# Altium PCB gui.PcbDoc
Units mm, origin at the board's own origin, x right, y up, seen from the top; angles counter-clockwise.
Board outline 33.53 x 44.07 mm, 2 copper layers (Top Layer, Bottom Layer); 7 components, 13 nets, 43 pads, 0 vias.
Unrouted connection lines stored in the file: 1.
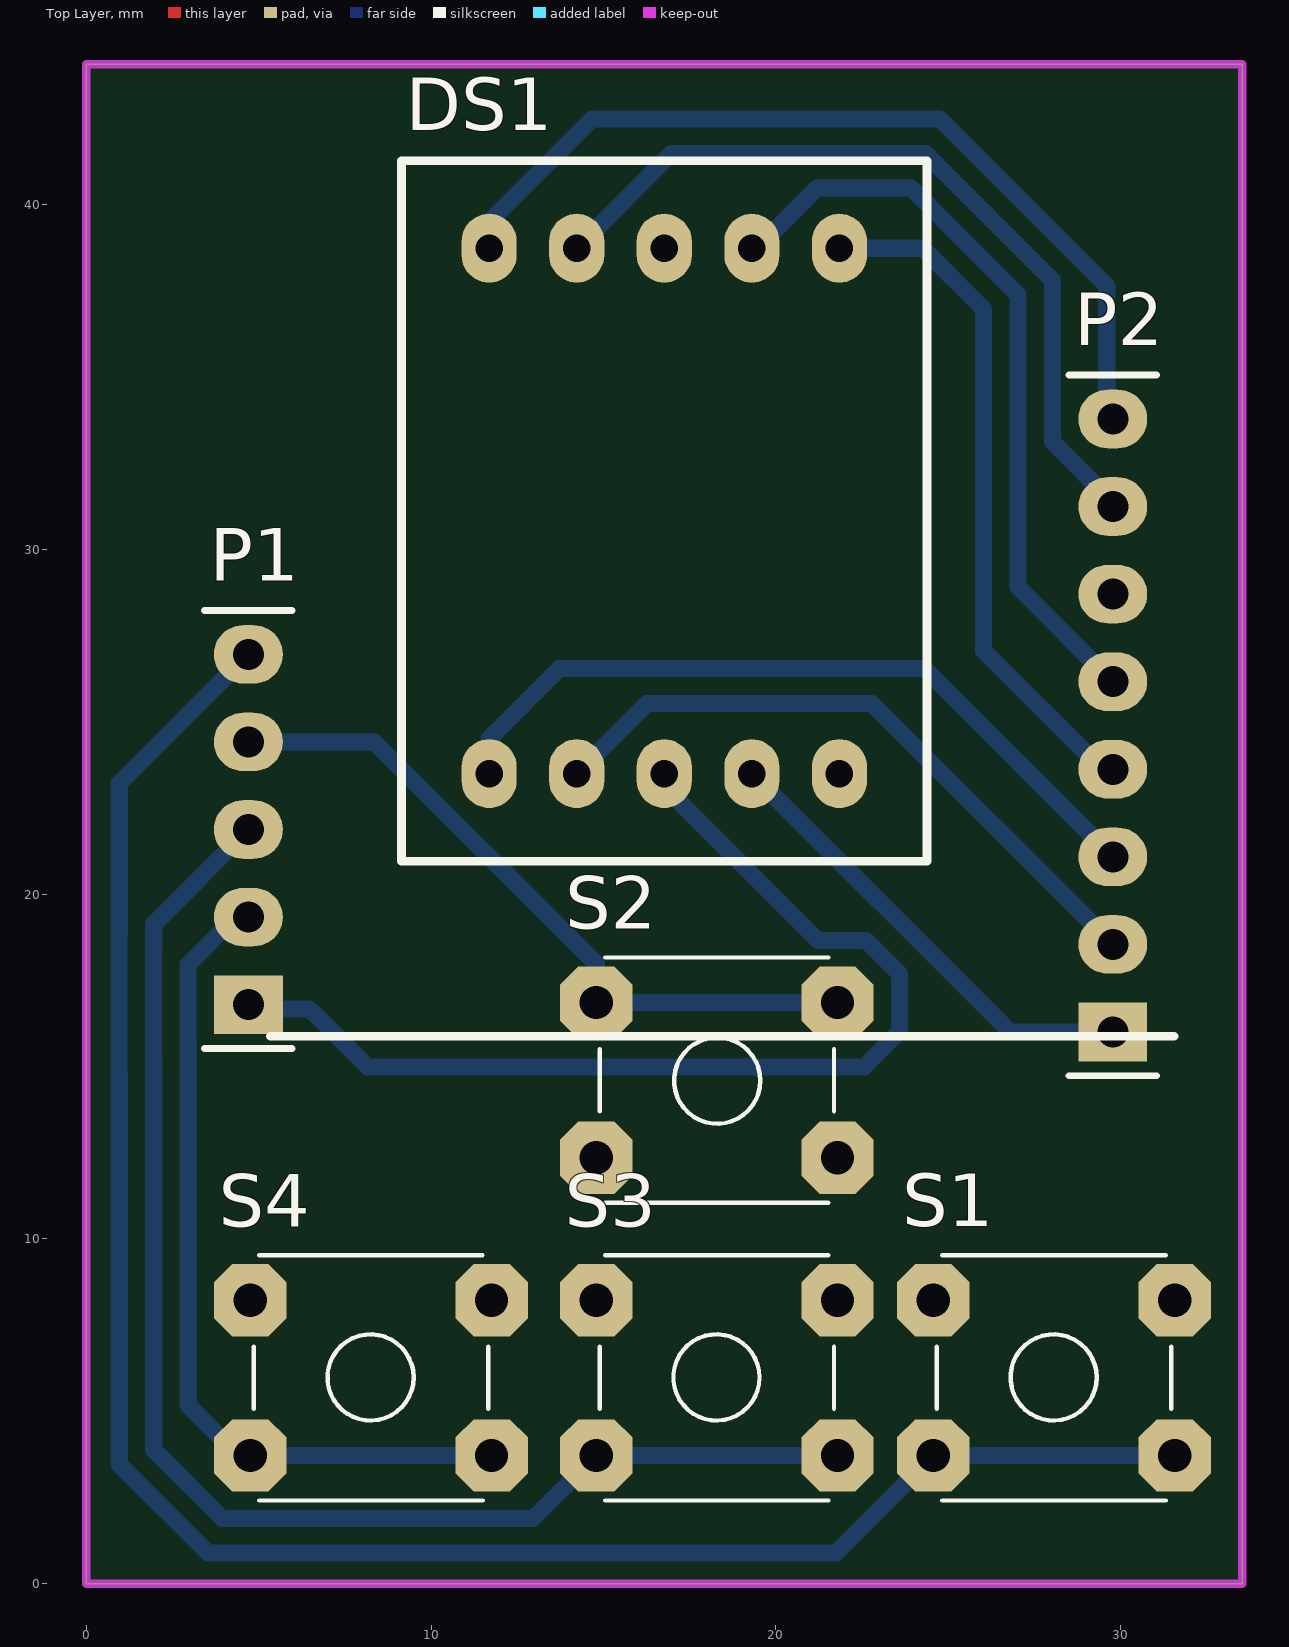
[diagram p0: Top Layer view]
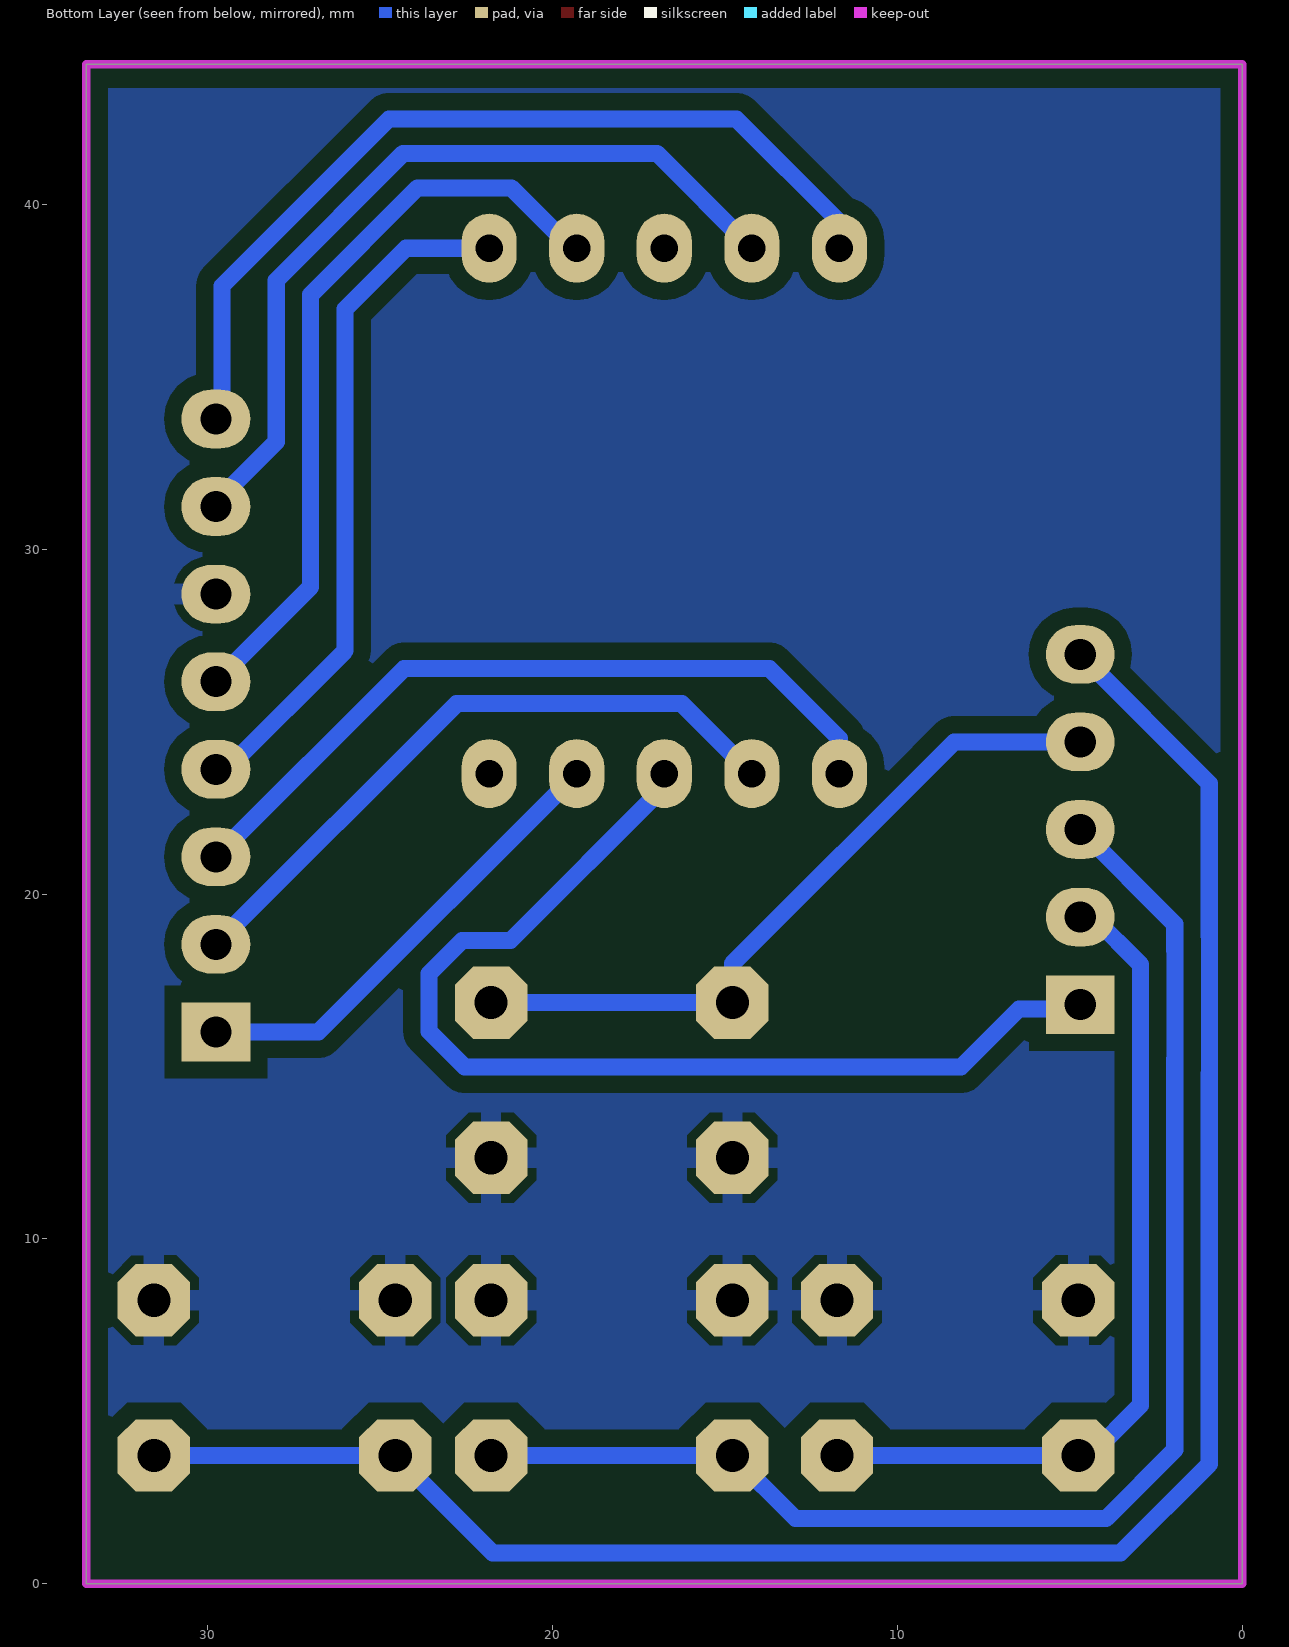
[diagram p1: Bottom Layer view, seen from below]
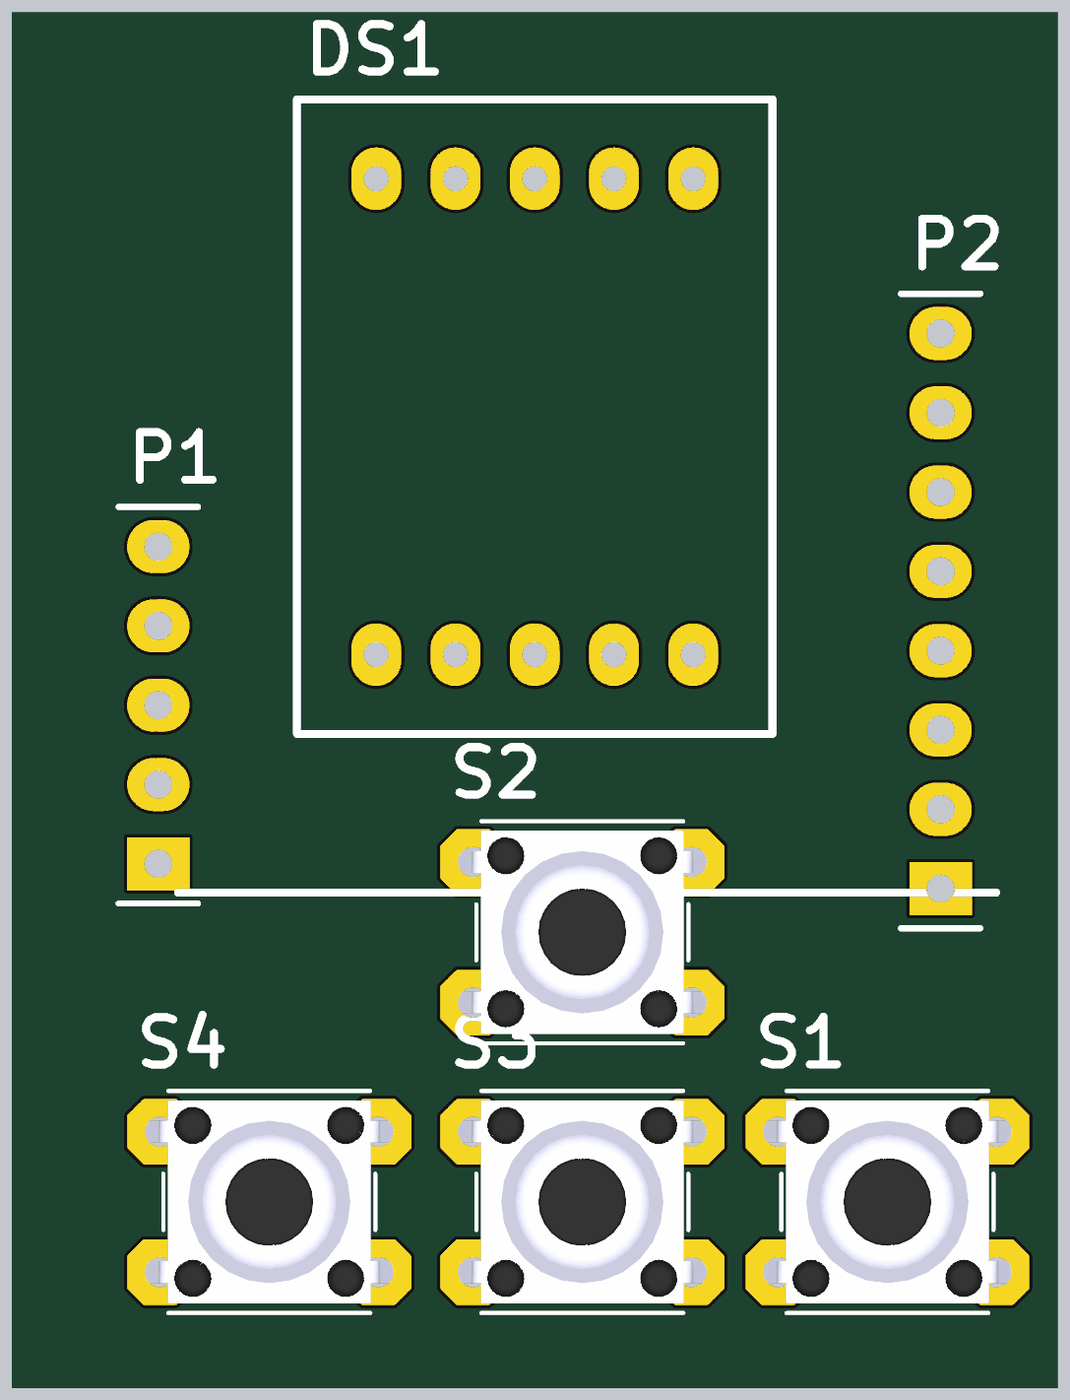
[diagram p2: 3D render of the assembled board from above, using the file's embedded part models]

## Layer stack, top to bottom
Top Solder: solder mask 0.0102, Solder Resist, Dk 3.5
Top Layer: signal copper 0.0356
Dielectric 1: dielectric 0.32, FR-4, Dk 4.8
Bottom Layer: signal copper 0.0356
Bottom Solder: solder mask 0.0102, Solder Resist, Dk 3.5

## Board outline
0,0 0,44.069 33.528,44.069 33.528,0

## Design rules (kind name [scope] priority, off if disabled: settings)
Clearance [All] p1: gap=0.5
PlaneConnect [All] p1: planeconnectstyle=Relief reliefexpansion=0.508 reliefentries=4 reliefconductorwidth=0.6 reliefairgap=0.254
PolygonConnect [All] p1: connectstyle=Relief reliefconductorwidth=0.6 reliefentries=4 polygonreliefangle="90 Angle" airgapwidth=0.254
RoutingVias [All] p1: holewidth=0.711 width=1.27 viastyle="Through Hole" minholewidth=0.711 minwidth=1.27 maxholewidth=0.711 maxwidth=1.27
SolderMaskExpansion [All] p1: expansion=0.102
Width [All] p1: maxlimit=1 minlimit=0.5 preferedwidth=0.7
29 further rules are at their usual default settings.

## Components (designator, comment, footprint, x,y, rotation, side; value= is the part's Value field where it differs from the comment)
DS1 "Device" PCBComponent_1 16.764,23.495 r0 top
P1 "Header 5" HDR1X5 4.699,16.795 r90 top
P2 "Header 8" HDR1X8 29.772,16.002 r90 top
S1 "SW_THT_PB_7.0mm" TACT-SWITCH-TS1170 28.067,5.969 r0 top
S2 "SW_THT_PB_7.0mm" TACT-SWITCH-TS1170 18.288,14.605 r180 top
S3 "SW_THT_PB_7.0mm" TACT-SWITCH-TS1170 18.288,5.969 r0 top
S4 "SW_THT_PB_7.0mm" TACT-SWITCH-TS1170 8.255,5.969 r0 top

## Footprints (in the part's own frame and the unit in brackets; to place one, negate y for a bottom-side part, rotate by r counter-clockwise, add the part's x,y. Pads: shape width x height; smd on the part's side, far side on the other; paste and mask are expansions set on the pad)
HDR1X5 [mm] "Connector; Header; 5 Position"
  rect 1.7x2 hole 0.9: 1(0,0)
  oval 1.7x2 hole 0.9: 2(2.54,0) 3(5.08,0) 4(7.62,0) 5(10.16,0)
  silkscreen extent -1.27,-1.27 11.43,1.27
HDR1X8 [mm] "Connector; Header; 8 Position"
  rect 1.7x2 hole 0.9: 1(0,0)
  oval 1.7x2 hole 0.9: 2(2.54,0) 3(5.08,0) 4(7.62,0) 5(10.16,0) 6(12.7,0) 7(15.24,0) 8(17.78,0)
  silkscreen extent -1.27,-1.27 19.05,1.27
PCBComponent_1 [mm]
  oval 1.6x2 hole 0.8: 1(-5.08,0) 2(-2.54,0) 3(0,0) 4(2.54,0) 5(5.08,0) 6(5.08,15.24) 7(2.54,15.24) 8(0,15.24) 9(-2.54,15.24) 10(-5.08,15.24)
  silkscreen extent -7.62,-2.54 7.62,17.78
TACT-SWITCH-TS1170 [mm] "Bondtact sealed TH tact switch"
  round 0.508 on Mech15: 0(0,0)
  oct 2.1x2.1 hole 0.965: 1(-3.5,-2.25) 1(3.5,-2.25) 2(-3.5,2.25) 2(3.5,2.25)
  silkscreen extent -3.4,-3.56 3.4,3.56, body extent -4.13,-3.25 4.13,3.25, height 7

## Part data
DS1: library part "7-Segment Red Display CA Type1", "7-Segment Red Display Common Anode"
P1: "Header, 5-Pin"
P2: "Header, 8-Pin"
S1 S2 S3 S4: "Switch, tact, 7.0mm stem"

## Nets (pads, with @x,y where several pads share a name; then routed paths per layer and width w, separated by ;. In a path a pad name is that pad's centre, name@x,y a point inside that pad or via, vN(x,y) a via of type N, cw(c..) or ccw(c..) an arc to the next point about the centre after c; other vN are vias at no path point)
BUT1: P1.5 S1.1 | length 57.9
  Bottom Layer w0.5: P1.5 0.955,23.211 0.955,18.79 0.949,18.784 0.949,14.806 0.955,14.8 0.955,3.469 3.535,0.889 21.737,0.889 24.567,3.719 S1.1@31.567,3.719
BUT2: P1.4 S2.1 | length 20.9
  Bottom Layer w0.5: P1.4 8.351,24.415 14.788,17.978 14.788,16.855 S2.1@21.788,16.855
BUT3: P1.3 S3.1 | length 40.6
  Bottom Layer w0.5: P1.3 1.955,19.131 1.955,18.376 1.949,18.37 1.949,15.22 1.955,15.214 1.955,3.883 3.949,1.889 12.958,1.889 14.788,3.719 S3.1@21.788,3.719
BUT4: P1.2 S4.1 | length 24.5
  Bottom Layer w0.5: P1.2 4.328,19.335 2.949,17.956 2.949,15.634 2.955,15.628 2.955,5.173 4.409,3.719 4.755,3.719 S4.1@11.755,3.719
D1: DS1.4 P2.1 | length 13.6
  Bottom Layer w0.5: DS1.4 26.797,16.002 P2.1
D2: DS1.2 P2.2 | length 19.3
  Bottom Layer w0.5: DS1.2 16.256,25.527 22.787,25.527 P2.2
D3: DS1.1 P2.3 | length 22.2
  Bottom Layer w0.5: DS1.1 11.684,24.511 13.716,26.543 24.311,26.543 P2.3
D4: DS1.6 P2.4 | length 20
  Bottom Layer w0.5: DS1.6 24.257,38.735 26.022,36.97 26.022,27.064 29.464,23.622 P2.4
D5: DS1.7 P2.5 | length 22.1
  Bottom Layer w0.5: DS1.7 19.452,38.735 21.202,40.485 23.921,40.485 27.022,37.384 27.022,28.912 P2.5
D6: DS1.9 P2.7 | length 23.7
  Bottom Layer w0.5: DS1.9 16.974,41.485 24.335,41.485 28.022,37.798 28.022,33.119 29.772,31.369 P2.7
D7: DS1.10 P2.8 | length 25.8
  Bottom Layer w0.5: DS1.10 11.684,39.497 14.672,42.485 24.75,42.485 29.594,37.641 29.594,33.96 P2.8
GND: P2.6 S1.2 S2.2 S3.2 S4.2
VCC: DS1.3 DS1.8 P1.1 | length 31.2
  Bottom Layer w0.5: P1.1 4.826,16.668 6.477,16.668 8.159,14.986 22.555,14.986 23.588,16.019 23.588,17.691 22.624,18.655 21.223,18.655 16.764,23.114 DS1.3
pads on no net: DS1.5 S1.0 S2.0 S3.0 S4.0

## Polygon pours and split planes (outlines as drawn)
GND on Bottom Layer "Bottom Layer-No Net" (solid, remove dead copper, pour order 3): -0.325,43.37 33.711,43.37 33.711,-0.518 -0.198,-0.518 -0.325,-0.391

## Keep-outs
Keep-Out Layer:
  the board outline again, w0.254

## Silkscreen, mask and mechanical layers (free items; w line width, h text height)
Top Overlay:
  lines w0.254: 5.334,15.875 31.55,15.875